# Altium PCB R3Change_1.PcbDoc
Units mil, origin at the board's own origin, x right, y up, seen from the top; angles counter-clockwise.
Board outline 3937.01 x 3937.01 mil, 2 copper layers (Top Layer, Bottom Layer); 41 components, 16 nets, 104 pads, 4 vias.
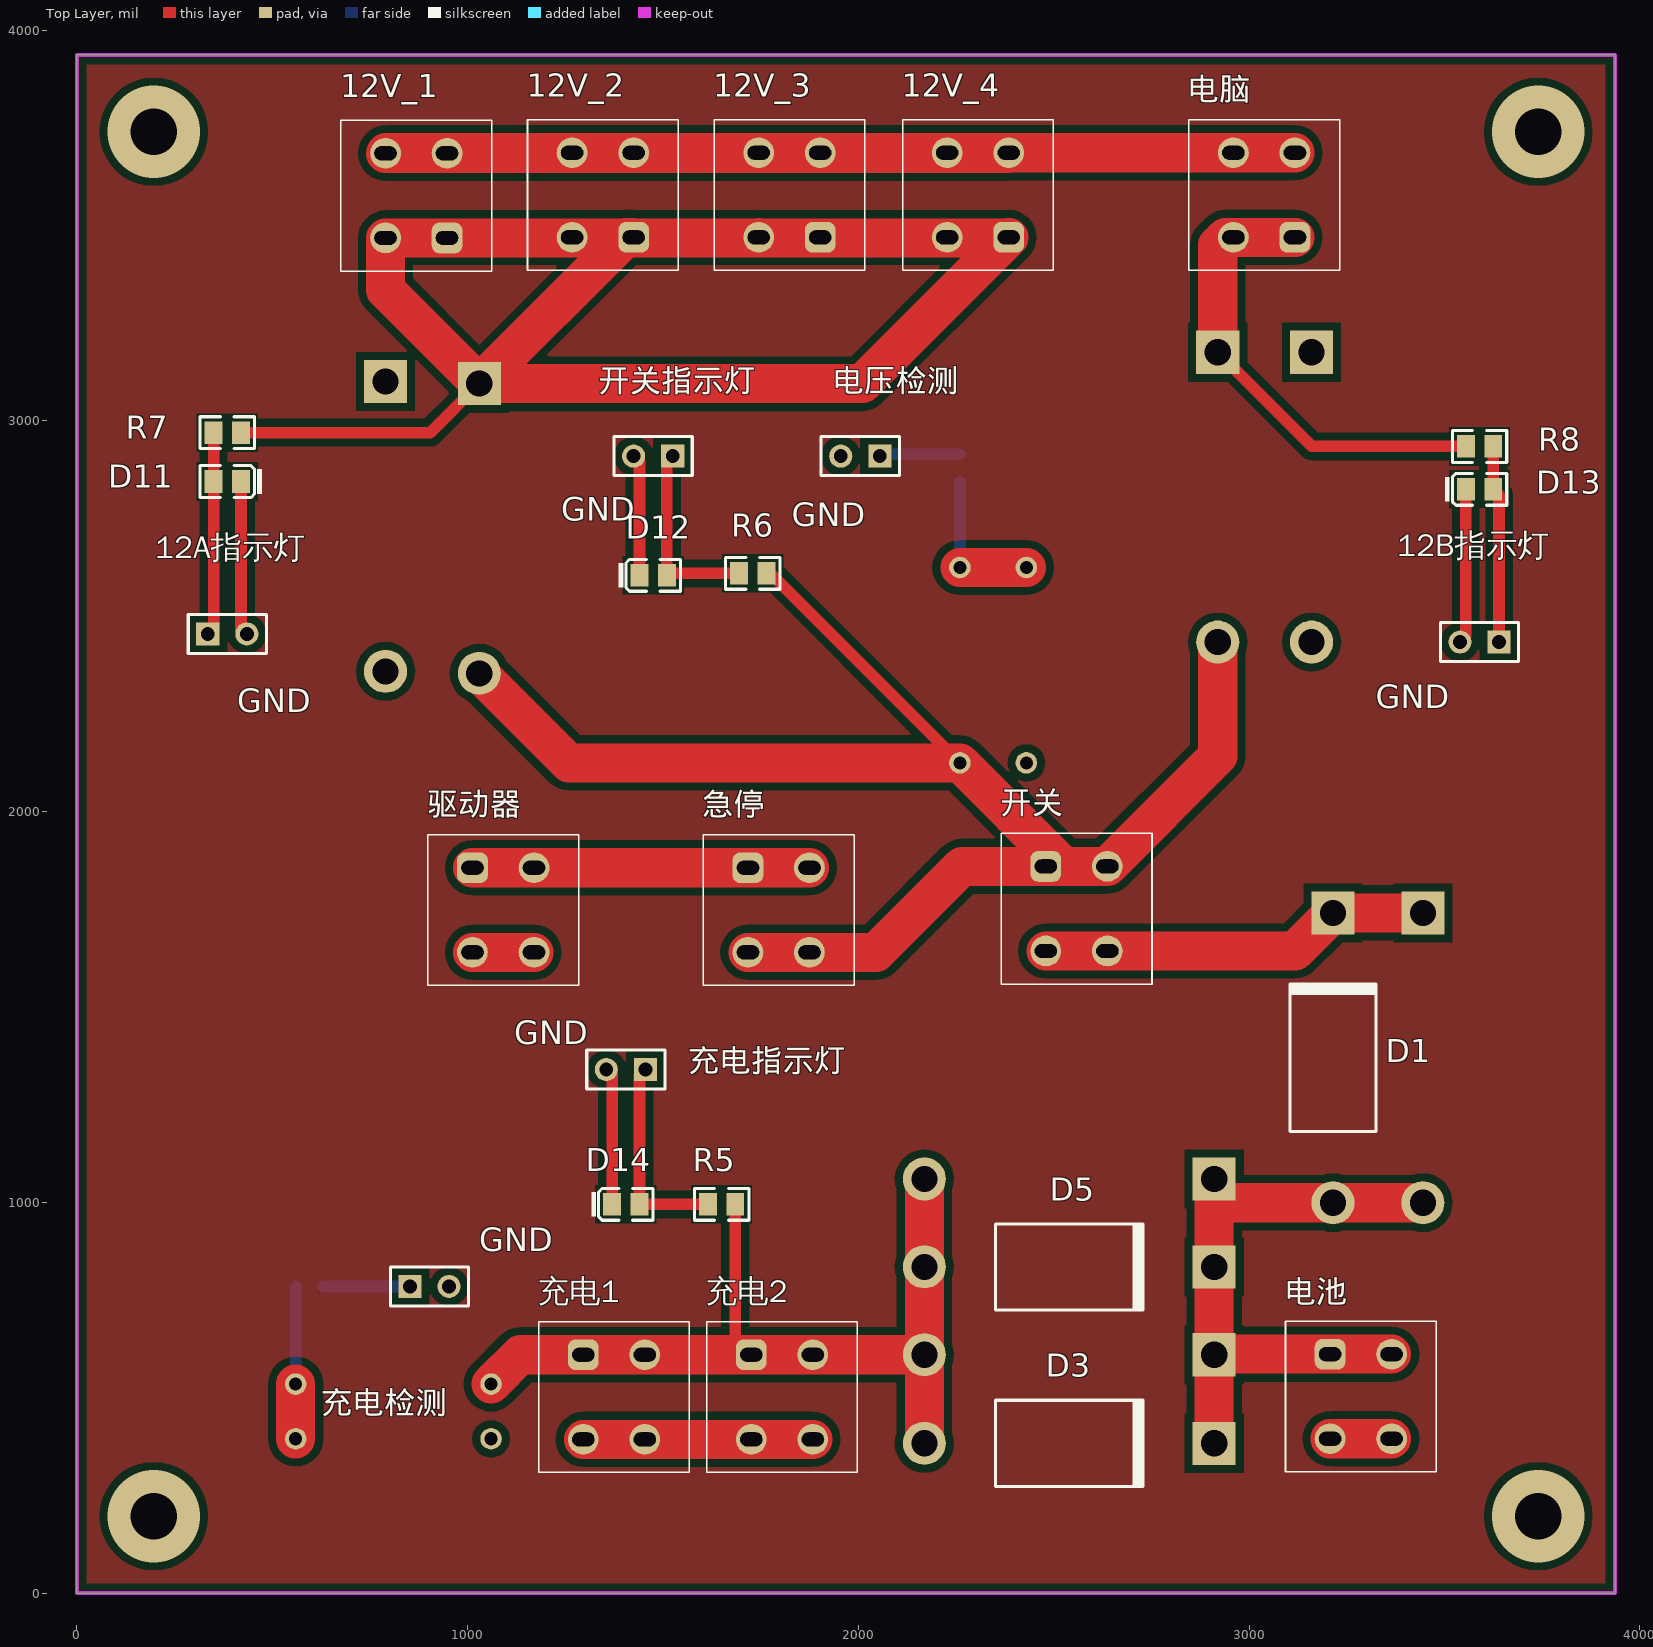
[diagram p0: Top Layer view]
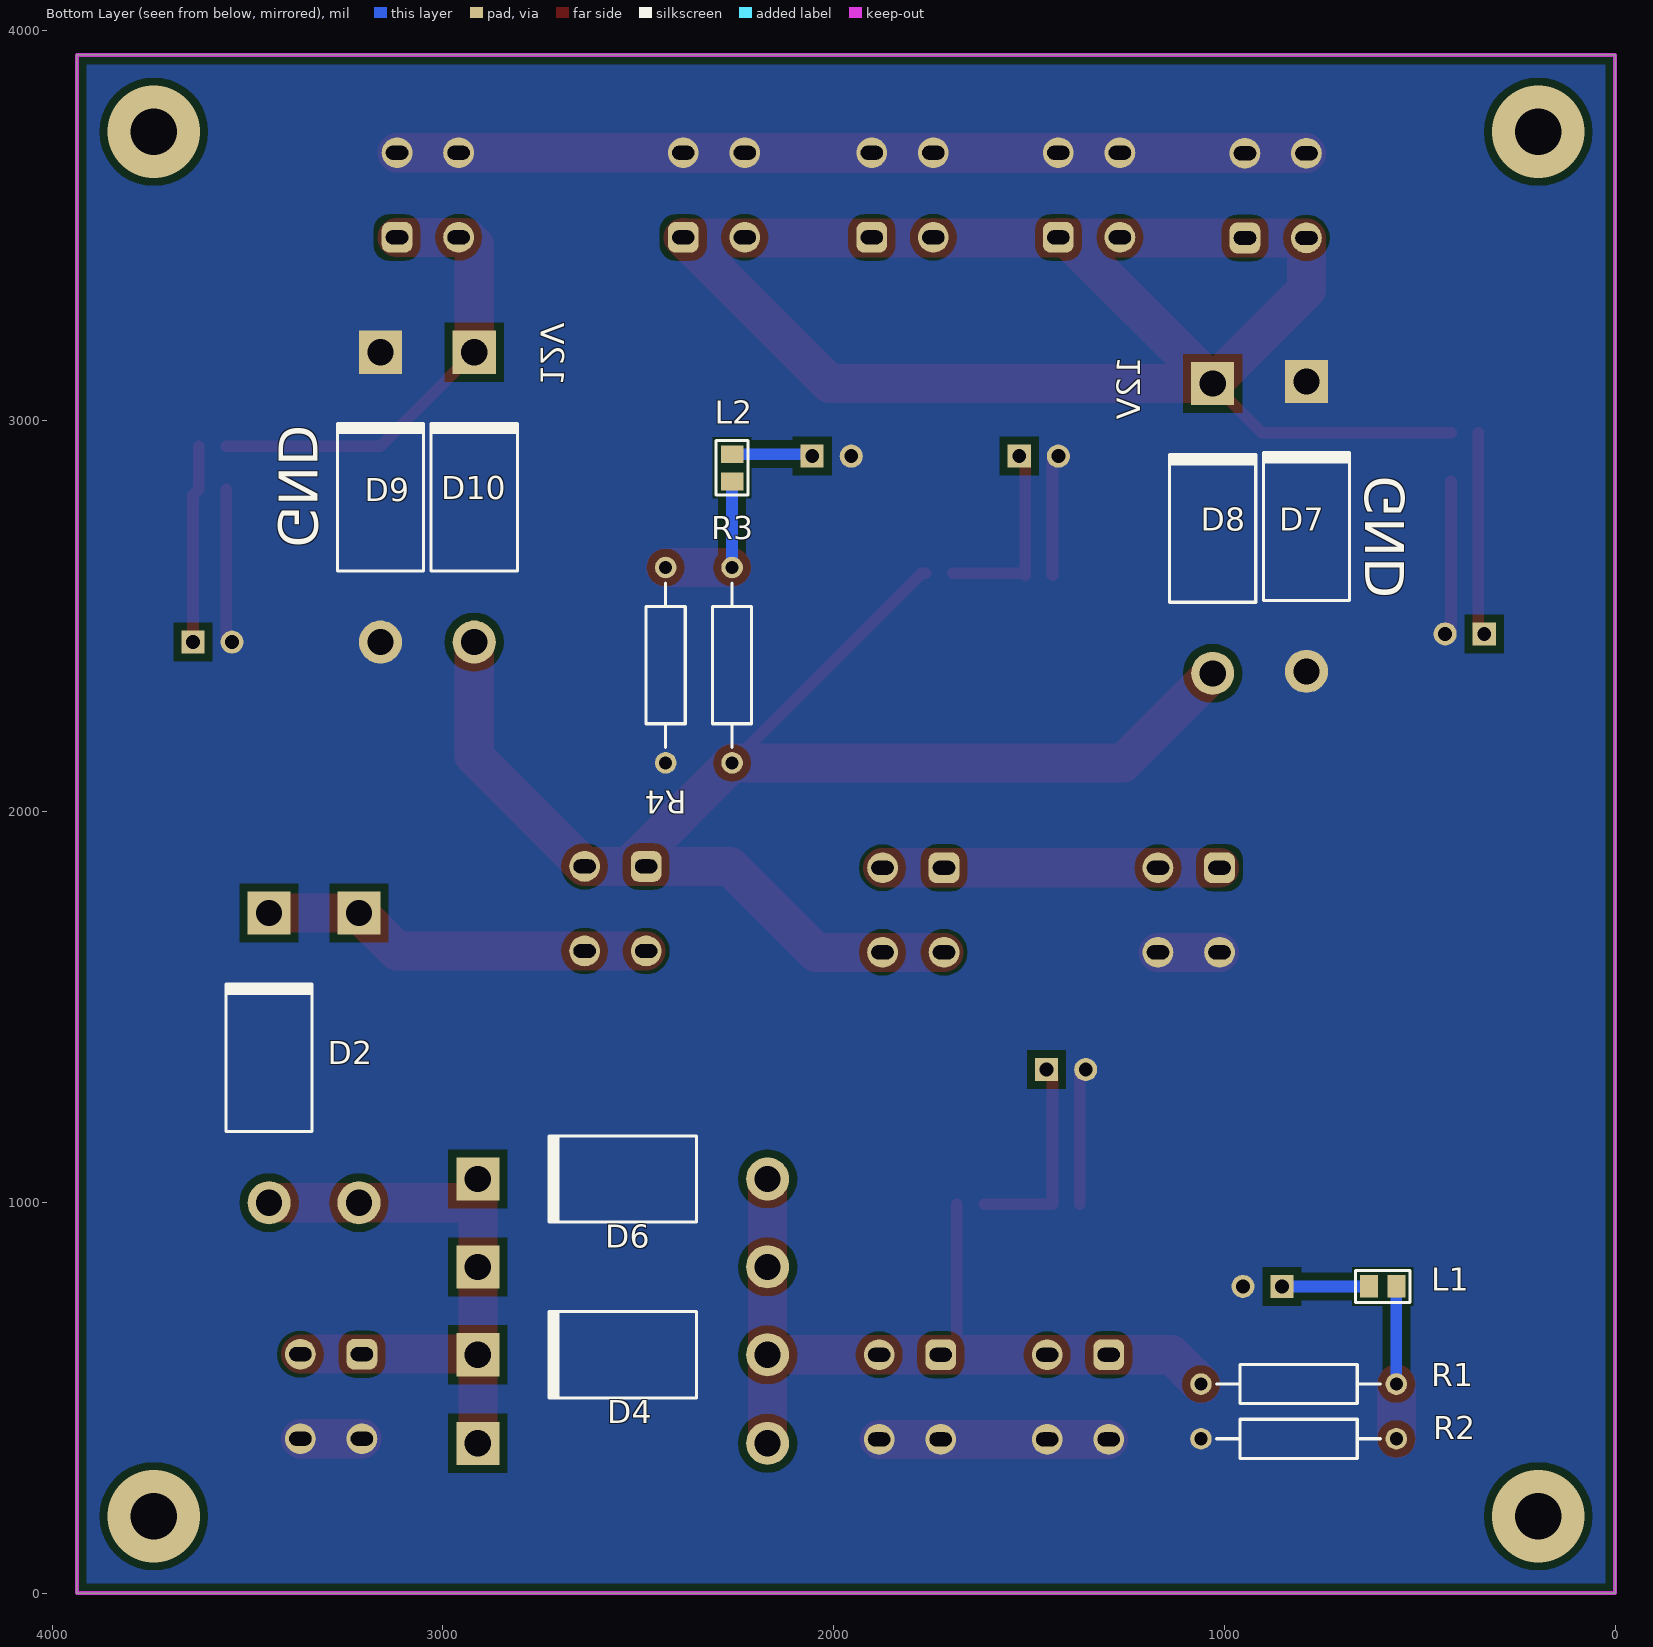
[diagram p1: Bottom Layer view, seen from below]

## Layer stack, top to bottom
Top Solder: solder mask 0.4, Solder Resist, Dk 3.5
Top Layer: signal copper 1.4
Dielectric 1: dielectric 12.6, FR-4, Dk 4.8
Bottom Layer: signal copper 1.4
Bottom Solder: solder mask 0.4, Solder Resist, Dk 3.5

## Board outline
0,0 3937.01,0 3937.01,3937.01 0,3937.01

## Design rules (kind name [scope] priority, off if disabled: settings)
Clearance [All] p1: gap=20 ignorepadtopadclearanceinfootprint=FALSE
PlaneConnect [All] p1: planeconnectstyle=Direct reliefexpansion=20 reliefentries=4 reliefconductorwidth=10 reliefairgap=10
PolygonConnect [All] p1: connectstyle=Direct reliefconductorwidth=10 reliefentries=4 polygonreliefangle="90 Angle" airgapwidth=10
RoutingVias [All] p1: holewidth=28 width=50 viastyle="Through Hole" minholewidth=28 minwidth=50 maxholewidth=28 maxwidth=50
SolderMaskExpansion [All] p1: expansion=4
Width [All] p1: maxlimit=100 minlimit=10 preferedwidth=30
29 further rules are at their usual default settings.

## Components (designator, comment, footprint, x,y, rotation, side; value= is the part's Value field where it differs from the comment)
12A指示灯 "Header 2" HDR1X2 335,2455 r0 top
12B指示灯 "Header 2" HDR1X2 3640,2434.13 r180 top
12V_1 "插座" "HEADER 2X2" 1061.65,3769.65 r180 top
12V_2 "插座" "HEADER 2X2" 1539.15,3771.18 r180 top
12V_3 "插座" "HEADER 2X2" 2016.65,3771.18 r180 top
12V_4 "插座" "HEADER 2X2" 2499.17,3771.18 r180 top
D1 "Diode 1N5408" DO-201AD 3215,1370 r90 top
D2 "Diode 1N5408" DO-201AD 3445,1370 r90 bottom
D3 "Diode 1N5408" DO-201AD 2540,383.46 r0 top
D4 "Diode 1N5408" DO-201AD 2540,610 r0 bottom
D5 "Diode 1N5408" DO-201AD 2540,835 r0 top
D6 "Diode 1N5408" DO-201AD 2540,1060 r0 bottom
D7 "Diode 1N5408" DO-201AD 1030,2725 r90 bottom
D8 "Diode 1N5408" DO-201AD 790,2730 r90 bottom
D9 "Diode 1N5408" DO-201AD 2920,2805 r90 bottom
D10 "Diode 1N5408" DO-201AD 3160,2805 r90 bottom
D11 "红灯 0805" LC-0805_LED_S1 385,2845 r180 top
D12 "红灯 0805" LC-0805_LED_S1 1475,2605 r0 top
D13 "红灯 0805" LC-0805_LED_S1 3590,2825 r0 top
D14 "红灯 0805" LC-0805_LED_S1 1405,995 r0 top
L1 "47uH ±10%" LC-0805_L 594.96,785 r180 bottom
L2 "47uH ±10%" LC-0805_L 2260,2880 r270 bottom
R1 "Res Semi" AXIAL-0.5 810,535 r0 bottom value=100K
R2 "Res Semi" AXIAL-0.5 810,395 r180 bottom value=10K
R3 "Res Semi" AXIAL-0.5 2260,2375 r270 bottom value=100K
R4 "Res Semi" AXIAL-0.5 2430,2375 r90 bottom value=10K
R5 "62KΩ (6202) ±1%" LC-0805_R 1650.04,995 r0 top
R6 "33KΩ (3302) ±1%" LC-0805_R 1730,2610 r0 top
R7 "15KΩ (1502) ±1%" LC-0805_R 385,2970 r180 top
R8 "15KΩ (1502) ±1%" LC-0805_R 3590,2935 r0 top
充电1 "插座" "HEADER 2X2" 1182,308.82 r0 top
充电2 "插座" "HEADER 2X2" 1612,308.82 r0 top
充电指示灯 "Header 2" HDR1X2 1455,1340 r180 top
充电检测 "Header 2" HDR1X2 852.48,785 r0 top
开关 "插座" "HEADER 2X2" 2365.83,1558.82 r0 top
开关指示灯 "Header 2" HDR1X2 1525,2910 r180 top
急停 "插座" "HEADER 2X2" 1603.35,1555.35 r0 top
电压检测 "Header 2" HDR1X2 2055,2910 r180 top
电池 "插座" "HEADER 2X2" 3093.35,310.35 r0 top
电脑 "插座" "HEADER 2X2" 3231.65,3771.18 r180 top
驱动器 "插座" "HEADER 2X2" 898.35,1555.35 r0 top

## Footprints (in the part's own frame and the unit in brackets; to place one, negate y for a bottom-side part, rotate by r counter-clockwise, add the part's x,y. Pads: shape width x height; smd on the part's side, far side on the other; paste and mask are expansions set on the pad)
AXIAL-0.5 [mm] "Axial Device, Thru-Hole; 2 Leads; 0.5 in Pin Spacing"
  round 1.4 hole 0.85: 1(-6.35,0) 2(6.35,0)
  silkscreen extent -5.33,-1.27 5.33,1.27
DO-201AD [mm] "Diode, Axial; Body 9.5 x 5.6 mm (LxDia. max), Lead Dia. 1.32 mm (max)"
  round 2.8 hole 1.7: 1(-9.42,0)
  rect 2.8x2.8 hole 1.7: 2(9.42,0)
  silkscreen extent -4.8,-2.8 4.9,2.8
HDR1X2 [mm] "Connector; Header; 2 Position"
  rect 1.5x1.5 hole 0.9: 1(0,0)
  round 1.5 hole 0.9: 2(2.54,0)
  silkscreen extent -1.27,-1.27 3.81,1.27
"HEADER 2X2" [mm] "Header 2X2"
  rrect50% 2x2 hole 0.9 slot 1.45 at 0 deg: 1(2.9,7.65)
  round 2 hole 0.9 slot 1.45 at 0 deg: 2(2.9,2.15) 3(6.9,7.65) 4(6.9,2.15)
  silkscreen extent 0,0 9.8,9.8
LC-0805_L [mm]
  rect 1.16x1.47 smd: 1(-0.89,0) 2(0.89,0)
  silkscreen extent -1.77,-1.04 1.77,1.03, body extent -1,-0.64 1,0.64, height 0.6
LC-0805_LED_S1 [mm]
  rect 1.16x1.47 smd: A(0.89,0) K(-0.89,0)
  silkscreen extent -2.25,-1.04 1.77,1.03, body extent -1.01,-0.62 1.01,0.62, height 1.1
LC-0805_R [mm]
  rect 1.16x1.47 smd: 1(-0.89,0) 2(0.89,0)
  silkscreen extent -1.77,-1.04 1.77,1.03, body extent -1,-0.62 1,0.63, height 0.49

## Part data
12A指示灯 12B指示灯 充电指示灯 充电检测 开关指示灯 电压检测: "Header, 2-Pin", LatestRevisionDate=17-Jul-2002, LatestRevisionNote="Re-released for DXP Platform.", Publisher="Altium Limited"
12V_1 12V_2 12V_3 12V_4 充电1 充电2 开关 急停 电池 电脑 驱动器: library part HEADER_2X2
D1 D2 D3 D4 D5 D6 D7 D8 D9 D10: "3 Amp Medium Power Silicon Rectifier Diode", ComponentLink1Description="Manufacturer Link", ComponentLink1URL=http://www.irf.com/, DatasheetVersion=Aug-1984, LatestRevisionDate=17-Jul-2002, LatestRevisionNote="Re-released for DXP Platform.", PackageDescription="Diode, Axial; Body 9.5 x 5.3 mm (LxDia. max), Lead Dia. 1.32 mm (max)", PackageReference=DO-201AD, Published=8-Jun-2000, Publisher="Altium Limited"
D11 D12 D13 D14: library part "0805 红灯", "发光二极管", Package=0805, SuppliersPartNumber=C2295, ComponentLink1Description=供应商, ComponentLink1URL=http://www.szlcsc.com/product/details_2668.html, Supplier=LC
L1 L2: library part "0805 47uH 10%", "贴片电感", Package=0805, SuppliersPartNumber=C14304, ComponentLink1Description=供应商, ComponentLink1URL=http://www.szlcsc.com/product/details_14964.html, Supplier=LC
R1 R2 R3 R4: "Semiconductor Resistor", LatestRevisionDate=17-Jul-2002, LatestRevisionNote="Re-released for DXP Platform.", PackageDescription="Axial Device, Thru-Hole; 2 Leads; 0.5 in Pin Spacing", PackageReference=AXIAL-0.5, Published=8-Jun-2000, Publisher="Altium Limited"
R5: library part "0805 62KΩ (6202) 1%", "贴片电阻", Package=0805, SuppliersPartNumber=C17783, ComponentLink1Description=供应商, ComponentLink1URL=http://www.szlcsc.com/product/details_18471.html, Supplier=LC
R6: library part "0805 33KΩ (3302) 1%", "贴片电阻", Package=0805, SuppliersPartNumber=C17633, ComponentLink1Description=供应商, ComponentLink1URL=http://www.szlcsc.com/product/details_18321.html, Supplier=LC
R7 R8: library part "0805 15KΩ (1502) 1%", "贴片电阻", Package=0805, SuppliersPartNumber=C17475, ComponentLink1Description=供应商, ComponentLink1URL=http://www.szlcsc.com/product/details_18163.html, Supplier=LC

## Via types
v1: diameter 236.22, hole 118.11, Top Layer to Bottom Layer, 4 vias

## Nets (pads, with @x,y where several pads share a name; then routed paths per layer and width w, separated by ;. In a path a pad name is that pad's centre, name@x,y a point inside that pad or via, vN(x,y) a via of type N, cw(c..) or ccw(c..) an arc to the next point about the centre after c; other vN are vias at no path point)
+12_A: 12V_1.1 12V_1.3 12V_2.1 12V_2.3 12V_3.1 12V_3.3 12V_4.1 12V_4.3 D7.2 R7.1 | length 4789.7
  Top Layer w30: R7.1 904.13,2970 D7.2
  Top Layer w100: 12V_2.1 1404.13,3470 12V_2.1@1402.6,3468.46 ; 12V_3.3 12V_3.3@1743.46,3468.46 ; 12V_4.1 12V_4.1@2383.46,3468.46 ; D7.2 790,3335.87 12V_1.3 12V_2.1@1402.6,3468.46 ; D7.2 2010.87,3095.87 12V_4.1@2383.46,3468.46 ; D7.2 12V_2.1@1402.6,3468.46 ; 12V_2.1@1402.6,3468.46 12V_3.3@1743.46,3468.46 ; 12V_3.3@1743.46,3468.46 12V_4.1@2383.46,3468.46
+12_B: D9.2 R8.1 电脑.1 电脑.3 | length 1214.6
  Top Layer w30: D9.2 3160.87,2935 R8.1
  Top Layer w100: D9.2 2920,3450 2940,3470 电脑.1
+24: D7.1 D9.1 R3.2 R6.2 开关.1 开关.3 急停.2 急停.4 | length 4097.8
  Top Layer w30: R6.2 1775,2610 R3.2
  Top Layer w100: D7.1 1259.13,2125 R3.2 2525,1860 ; 急停.2 急停.4 2045,1640 2265,1860 开关.1 2525,1860 ; D9.1 2920,2142.52 开关.3 2525,1860
+24_A: D1.2 D2.2 开关.2 开关.4 | length 1005.3
  Top Layer w100: 开关.2 3117.6,1643.46 D1.2 D2.2
Battery+: D1.1 D2.1 D3.2 D4.2 D5.2 D6.2 电池.1 电池.3 | length 1669.2
  Top Layer w100: D3.2 D4.2 ; D6.2 2910.87,990 ; 电池.3 电池.1 2912.4,611.54 D4.2 ; D2.1 D1.1 2920,999.13 2910.87,990 ; D4.2 D5.2 2910.87,990
GND: 12A指示灯.2 12B指示灯.2 12V_1.2 12V_1.4 12V_2.2 12V_2.4 12V_3.2 12V_3.4 12V_4.2 12V_4.4 D8.1 D8.2 D10.1 D10.2 D11.K D12.K D13.K D14.K R2.1 R4.1 充电1.2 充电1.4 充电2.2 充电2.4 充电指示灯.2 充电检测.2 开关指示灯.2 电压检测.2 电池.2 电池.4 电脑.2 电脑.4 驱动器.2 驱动器.4 | length 6281.8
  Top Layer w30: D11.K 420.04,2469.96 12A指示灯.2 ; 充电指示灯.2 1369.96,1325.04 D14.K ; 开关指示灯.2 1439.96,2895.04 D12.K ; 12B指示灯.2 3554.96,2449.09 D13.K
  Top Layer w100: 驱动器.2 驱动器.4 ; 充电1.2 充电1.4 充电2.2 充电2.4 ; 电脑.2 12V_4.2 ; 电池.2 电池.4 ; 12V_4.2 12V_4.4 12V_3.2 12V_2.4 791.54,3686.54 12V_1.4 12V_1.2 2383.46,3685 12V_4.2
Net12A指示灯_1: 12A指示灯.1 D11.A R7.2 | length 521.2
  Top Layer w30: 12A指示灯.1 349.96,2469.96 D11.A R7.2
Net12B指示灯_1: 12B指示灯.1 D13.A R8.2 | length 507.1
  Top Layer w30: R8.2 D13.A 3640,2810.04 12B指示灯.1
NetD3_1: D3.1 D4.1 D5.1 D6.1 R1.2 R5.2 充电1.1 充电1.3 充电2.1 充电2.3 | length 2218.8
  Top Layer w30: R5.2 1685.08,651.09 充电2.1
  Top Layer w100: R1.2 1135,610 充电1.1 充电1.3 充电2.1 充电2.3 D4.1 ; D3.1 D4.1 ; D6.1 D5.1 D4.1
NetD12_A: D12.A R6.1 开关指示灯.1 | length 498.2
  Top Layer w30: 开关指示灯.1 1510.04,2895.04 D12.A 1515.04,2610 R6.1
NetD14_A: D14.A R5.1 充电指示灯.1 | length 526.2
  Top Layer w30: 充电指示灯.1 1440.04,1325.04 D14.A R5.1
NetL1_1: L1.1 充电检测.1 | length 222.5
  Bottom Layer w30: L1.1 充电检测.1
NetL1_2: L1.2 R1.1 R2.2 | length 390
  Top Layer w100: R2.2 R1.1
  Bottom Layer w30: L1.2 559.92,535.08 R1.1
NetL2_1: L2.1 电压检测.1 | length 207.1
  Bottom Layer w30: 电压检测.1 2060.04,2915.04 L2.1
NetL2_2: L2.2 R3.1 R4.2 | length 390
  Top Layer w100: R3.1 R4.2
  Bottom Layer w30: R3.1 L2.2
驱动: 急停.1 急停.3 驱动器.1 驱动器.3 | length 862.5
  Top Layer w100: 驱动器.1 驱动器.3 急停.1 急停.3
copper on no net:
  other v1: 196.85,196.85 3740.16,196.85 196.85,3740.16 3740.16,3740.16

## Polygon pours and split planes (outlines as drawn)
GND on Bottom Layer "Bottom Layer-GND" (solid, pour order 0): 0,3937.01 3937.01,3937.01 3937.01,0 0,0
no net on Top Layer "Top Layer-No Net" (solid, pour order 2): 0,3925 3937.01,3925 3937.01,0 0,0

## Keep-outs
Keep-Out Layer:
  the board outline again, w10

## Silkscreen, mask and mechanical layers (free items; w line width, h text height)
Top Overlay:
  text "GND" at 1240,2745 h60
  text "GND" at 1830,2730 h60
  text "GND" at 3325,2265 h60
  text "GND" at 410,2255 h60
  text "GND" at 1120,1405 h60
  text "GND" at 1030,875 h60
Bottom Overlay:
  text "12V" at 1215,3165 h60 r270
  text "12V" at 2750,3090 h60 r90
  text "GND" at 540,2860 h100 r270
  text "GND" at 3420,2675 h100 r90